# Altium PCB 5and12v.PcbDoc
Units mil, origin at the board's own origin, x right, y up, seen from the top; angles counter-clockwise.
Board outline 3690 x 2315 mil, 2 copper layers (Top Layer, Bottom Layer); 8 components, 5 nets, 22 pads, 0 vias.
Unrouted connection lines stored in the file: 15.
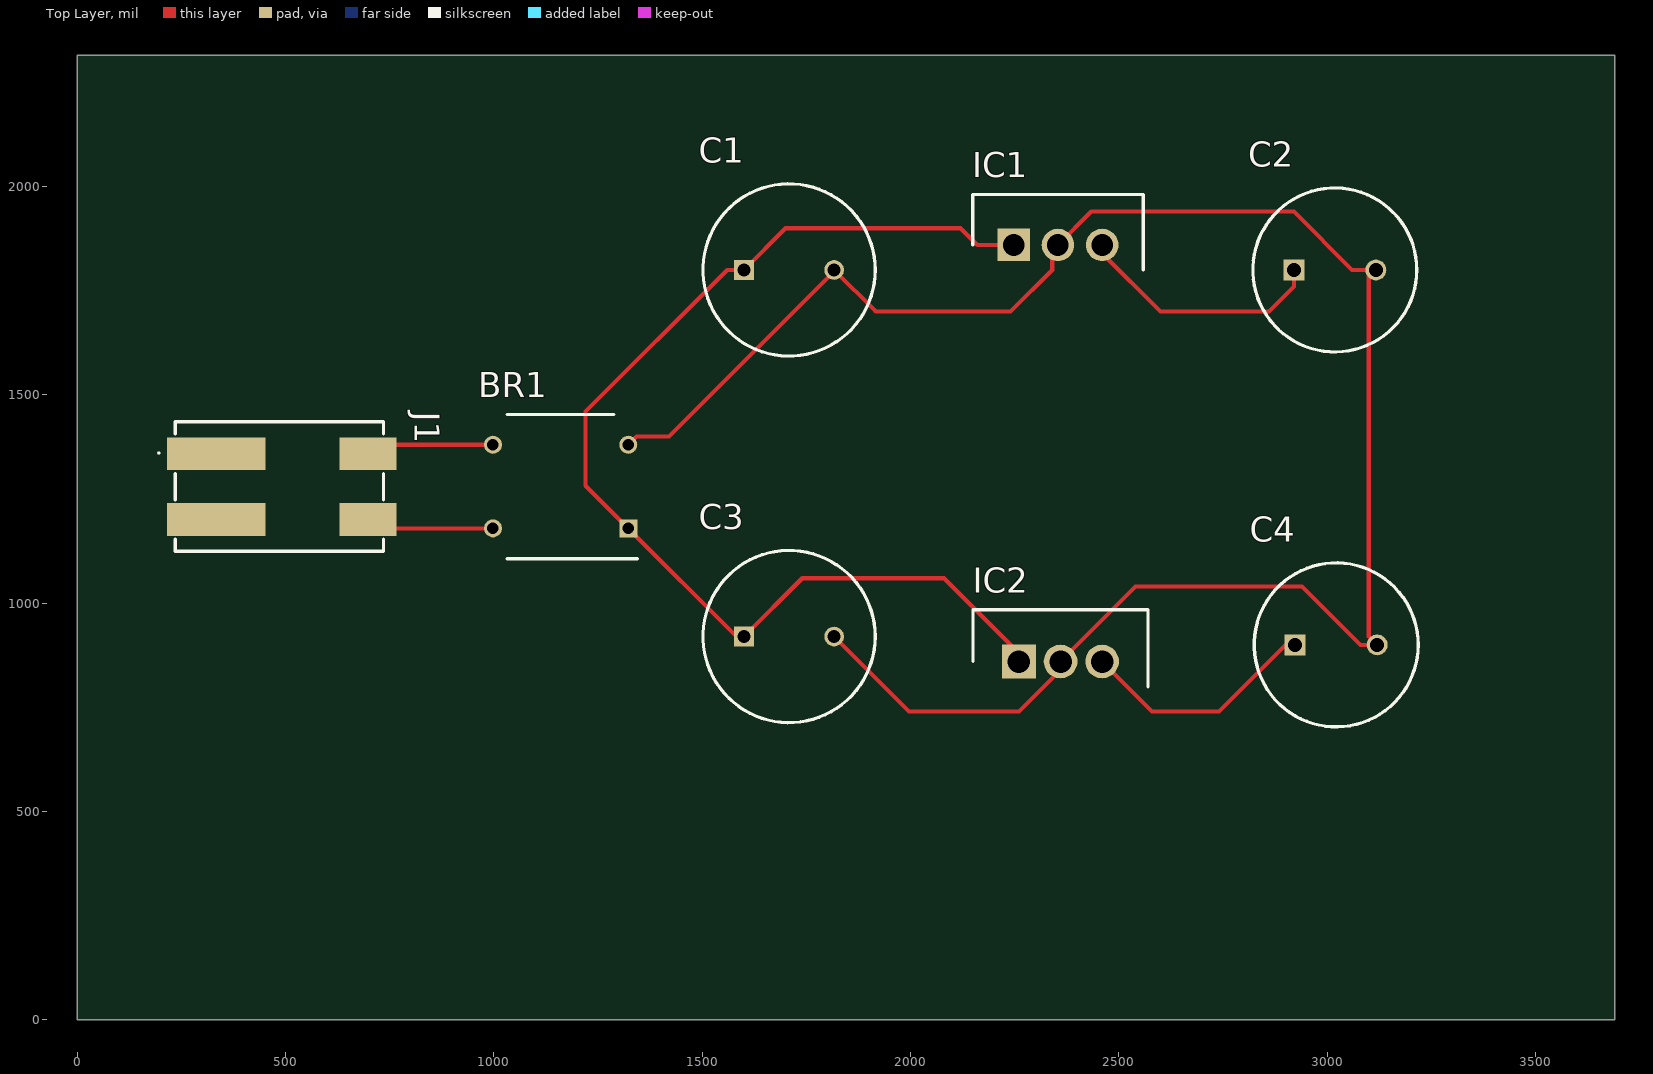
[diagram p0: Top Layer view]
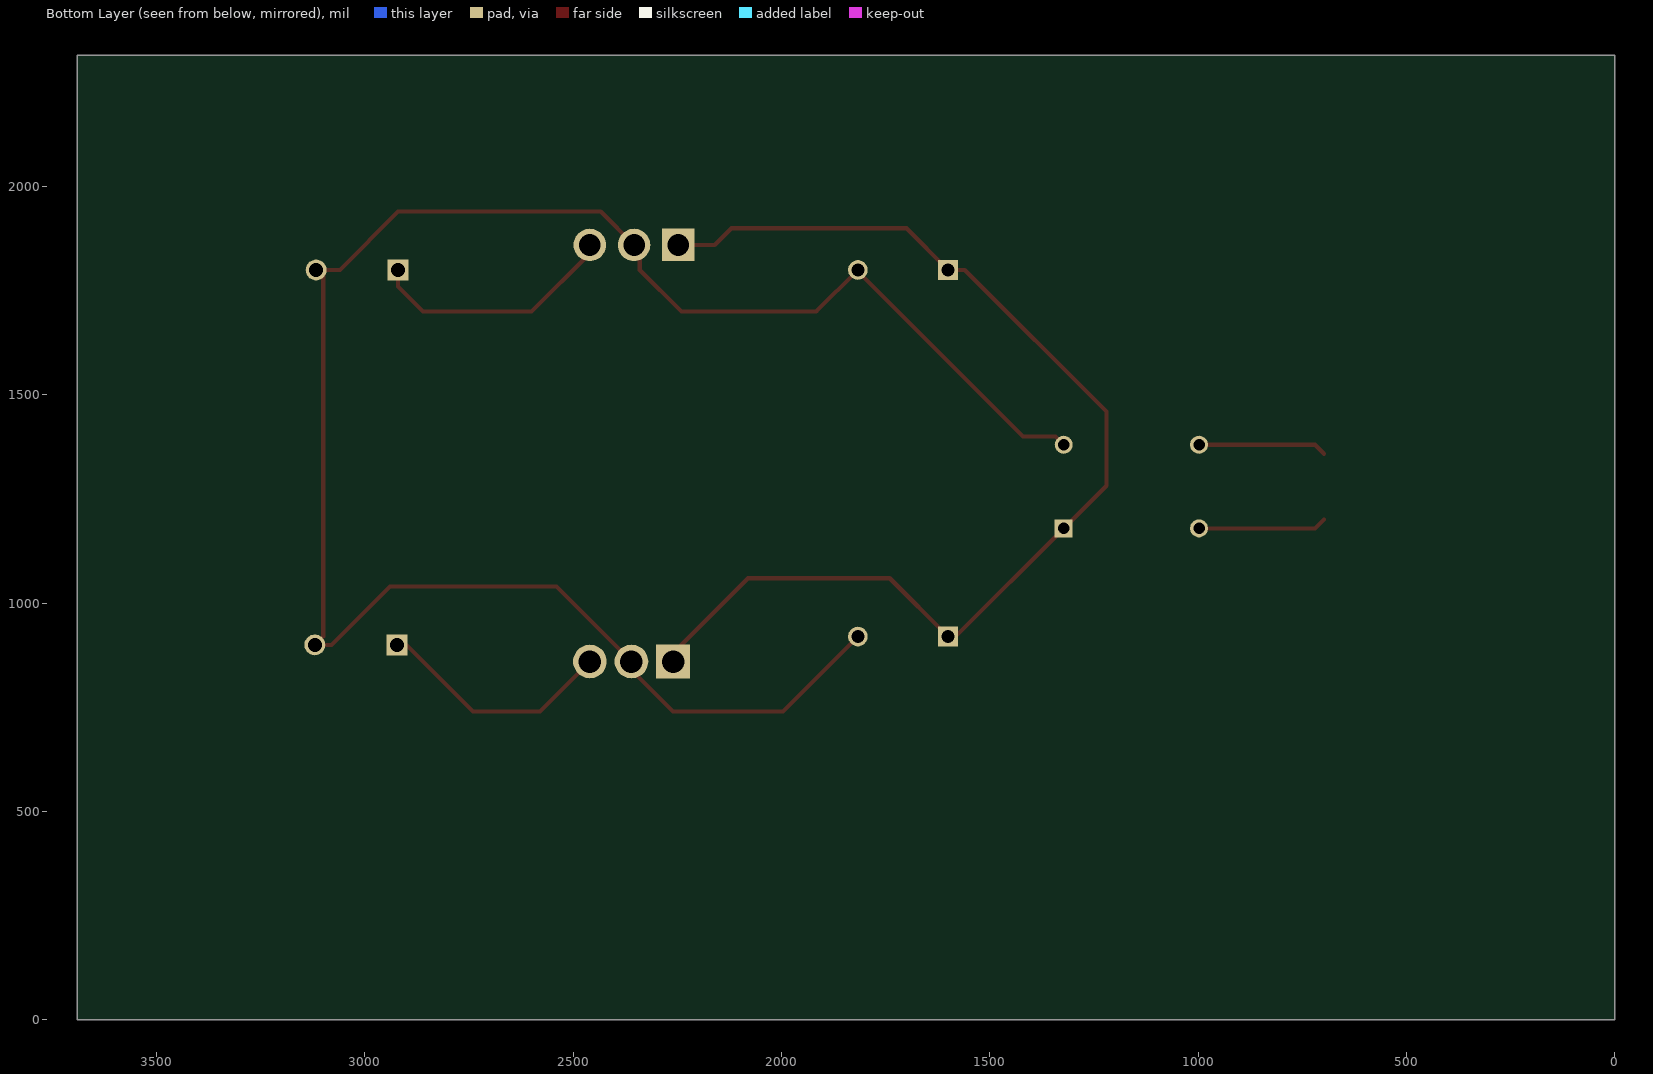
[diagram p1: Bottom Layer view, seen from below]

## Layer stack, top to bottom
Top Solder: solder mask 0.4, Solder Resist, Dk 3.5
Top Layer: signal copper 1.4
Dielectric 1: dielectric 12.6, FR-4, Dk 4.8
Bottom Layer: signal copper 1.4
Bottom Solder: solder mask 0.4, Solder Resist, Dk 3.5

## Board outline
0,0 3690,0 3690,2315 0,2315

## Design rules (kind name [scope] priority, off if disabled: settings)
Clearance [All] p1: gap=10 ignorepadtopadclearanceinfootprint=FALSE except(0: Arc-Hole Track-Hole SMDPad-Hole THPad-Hole Via-Hole Fill-Hole Poly-Hole Region-Hole Text-Hole)
PolygonConnect [All] p1: connectstyle=Relief reliefconductorwidth=10 reliefentries=4 polygonreliefangle="90 Angle" airgapwidth=10
RoutingVias [All] p1: holewidth=28 width=50 viastyle="Through Hole" minholewidth=28 minwidth=50 maxholewidth=28 maxwidth=50
SolderMaskExpansion [All] p1: expansion=4 istentingtop=FALSE
Width [All] p1: maxlimit=10 minlimit=10 preferedwidth=10
30 further rules are at their usual default settings.

## Components (designator, comment, footprint, x,y, rotation, side; value= is the part's Value field where it differs from the comment)
BR1 "DB107" DIP825W50P510L830H340Q4N 1160,1280 r180 top
C1 "1000uf" CAPPRD550W60D1050H2150 1600,1800 r0 top
C2 "100uf" CAPPRD500W65D1000H3200 2920,1800 r0 top
C3 "1000uf" CAPPRD550W60D1050H2150 1600,920 r0 top
C4 "100uf" CAPPRD500W65D1000H3200 2923.15,900 r0 top
IC1 "L7806CV" TO270P460X1020X2008-3P 2247.4,1860 r0 top
IC2 "LM7812ACT" TO254P470X1016X2019-3P 2260.2,860 r0 top
J1 "2060-452_998-404" 2060452998404 480,1280 r0 top

## Footprints (in the part's own frame and the unit in brackets; to place one, negate y for a bottom-side part, rotate by r counter-clockwise, add the part's x,y. Pads: shape width x height; smd on the part's side, far side on the other; paste and mask are expansions set on the pad)
2060452998404 [mm]
  rect 6x2 smd: 1(-3.725,2) 3(-3.725,-2)
  rect 3.5x2 smd: 2(5.525,2) 4(5.525,-2)
  silkscreen extent -7.27,-3.95 6.48,3.95, body extent -6.55,-3.95 6.55,3.95, height 4.5
CAPPRD500W65D1000H3200 [mm]
  rect 1.275x1.275 hole 0.85: 1(0,0)
  round 1.275 hole 0.85: 2(5,0)
  silkscreen extent -2.5,-5 7.5,5, body extent -2.73,-5.25 7.75,5.25, height 32
CAPPRD550W60D1050H2150 [mm]
  rect 1.2x1.2 hole 0.8: 1(0,0)
  round 1.2 hole 0.8: 2(5.5,0)
  silkscreen extent -2.5,-5.25 8,5.25, body extent -2.5,-5.24 8,5.24, height 21.5
DIP825W50P510L830H340Q4N [mm]
  rect 1.1x1.1 hole 0.7: 1(-4.125,2.55)
  round 1.1 hole 0.7: 2(-4.125,-2.55) 3(4.125,-2.55) 4(4.125,2.55)
  silkscreen extent -4.67,-4.4 3.25,4.4, body extent -4.25,-4.15 4.25,4.15, height 3.4
TO254P470X1016X2019-3P [mm]
  rect 2.055x2.055 hole 1.37: 1(0,0)
  round 2.055 hole 1.37: 2(2.535,0) 3(5.07,0)
  silkscreen extent -2.8,-1.55 7.87,3.15, body extent -2.55,-1.55 7.61,3.15, height 18.54
TO270P460X1020X2008-3P [mm]
  rect 1.98x1.98 hole 1.32: 1(0,0)
  round 1.98 hole 1.32: 2(2.7,0) 3(5.4,0)
  silkscreen extent -2.5,-1.53 7.9,3.07, body extent -2.4,-1.53 7.8,3.07, height 19.22

## Part data
BR1: "Bridge Rectifier", Manufacturer_Name=Rectron, Mouser Part Number=583-DB107, Datasheet Link=https://www.rectron.com/data_sheets/db101-107.pdf, Height=3.4mm, Manufacturer_Part_Number=DB107, Mouser Price/Stock=https://www.mouser.co.uk/ProductDetail/Rectron/DB107?qs=G5AQjGfRJcLGAY%252B6bEDnbw%3D%3D
C1 C3: library part 108CKE025M, "Capacitor Polarised", Manufacturer_Name="Cinch Connectivity Solutions", Datasheet Link=https://componentsearchengine.com/Datasheets/2/108CKE025M.pdf, Height=21.5mm, Manufacturer_Part_Number=108CKE025M
C2 C4: library part EEU-FC2A101L, "Capacitor Polarised", Manufacturer_Name=Panasonic, Mouser Part Number=667-EEU-FC2A101L, Arrow Part Number=EEU-FC2A101L, Arrow Price/Stock=https://www.arrow.com/en/products/eeu-fc2a101l/panasonic?region=nac, Datasheet Link=http://industrial.panasonic.com/cdbs/www-data/pdf/RDF0000/ABA0000C1209.pdf, Height=32mm, Manufacturer_Part_Number=EEU-FC2A101L, Mouser Price/Stock=https://www.mouser.co.uk/ProductDetail/Panasonic/EEU-FC2A101L?qs=MtOUKumLmnYYrYsMGpDvcw%3D%3D
IC1: "Integrated Circuit", Manufacturer_Name=STMicroelectronics, Mouser Part Number=511-L7806CV, Arrow Part Number=L7806CV, Arrow Price/Stock=https://www.arrow.com/en/products/l7806cv/stmicroelectronics?region=europe, Datasheet Link=http://www.st.com/web/en/resource/technical/document/datasheet/CD00000444.pdf, Height=4.6mm, Manufacturer_Part_Number=L7806CV, Mouser Price/Stock=https://www.mouser.co.uk/ProductDetail/STMicroelectronics/L7806CV?qs=K4DpzJ20gDEC%252BHE13eVUwg%3D%3D
IC2: "Integrated Circuit", Manufacturer_Name=onsemi, Mouser Part Number=512-LM7812ACT, Arrow Part Number=LM7812ACT, Arrow Price/Stock=https://www.arrow.com/en/products/lm7812act/on-semiconductor, Datasheet Link=https://datasheet.datasheetarchive.com/originals/distributors/Datasheets_SAMA/704b005d7d2d9ced5864f40b6609c1bc.pdf, Height=4.7mm, Manufacturer_Part_Number=LM7812ACT, Mouser Price/Stock=https://www.mouser.com/Search/Refine.aspx?Keyword=512-LM7812ACT
J1: "Connector", Arrow Part Number=2060-452/998-404, Manufacturer_Name=Wago, Arrow Price/Stock=https://www.arrow.com/en/products/2060-452998-404/wago-kontakttechnik-gmbh?region=nac, Datasheet Link=https://www.wago.com/2060-452/998-404, Height=4.5mm, Manufacturer_Part_Number=2060-452/998-404

## Nets (pads, with @x,y where several pads share a name; then routed paths per layer and width w, separated by ;. In a path a pad name is that pad's centre, name@x,y a point inside that pad or via, vN(x,y) a via of type N, cw(c..) or ccw(c..) an arc to the next point about the centre after c; other vN are vias at no path point)
GND: BR1.2 C1.2 C2.2 C3.2 C4.2 IC1.2 IC2.2
NetBR1_1: BR1.1 C1.1 C3.1 C4.1 IC1.1 IC2.1 IC2.3
NetBR1_3: BR1.3 J1.2
NetBR1_4: BR1.4 J1.4
NetC2_1: C2.1 IC1.3
pads on no net: J1.1 J1.3
copper on no net: | length 9192.2
  Top Layer w10: 697.52,1201.26 719.17,1179.61 997.6,1179.61 ; 697.52,1358.74 719.17,1380.39 997.6,1380.39 ; 1322.4,1380.39 1342.01,1400 1420,1400 1816.54,1796.54 1816.54,1800 ; 1816.54,920 1996.54,740 2260,740 2360,840 2360,860 2540,1040 2940,1040 3080,900 3120,900 3100,920 3100,1800 ; 1816.54,1798.27 1816.54,1800 ; 2240,1860 2160,1860 2120,1900 1720,1900 1700,1900 1600,1800 1560,1800 1220,1460 1220,1282.01 1322.4,1179.61 1582.01,920 1600,920 1740,1060 2080,1060 2260.2,879.8 2260.2,860 ; 2340,1860 2340,1800 2240,1700 1916.54,1700 1816.54,1800 ; 2353.7,1860 2433.7,1940 2920,1940 3060,1800 3116.85,1800 ; 2459.8,860 2579.8,740 2740,740 2900,900 2923.15,900 ; 2460,1840 2600,1700 2680,1700 2860,1700 2920,1760 2920,1800